# EAGLE board Trabalho_Layout_PCB_com_espaco_para_protoboard (EAGLE 9.7.0)
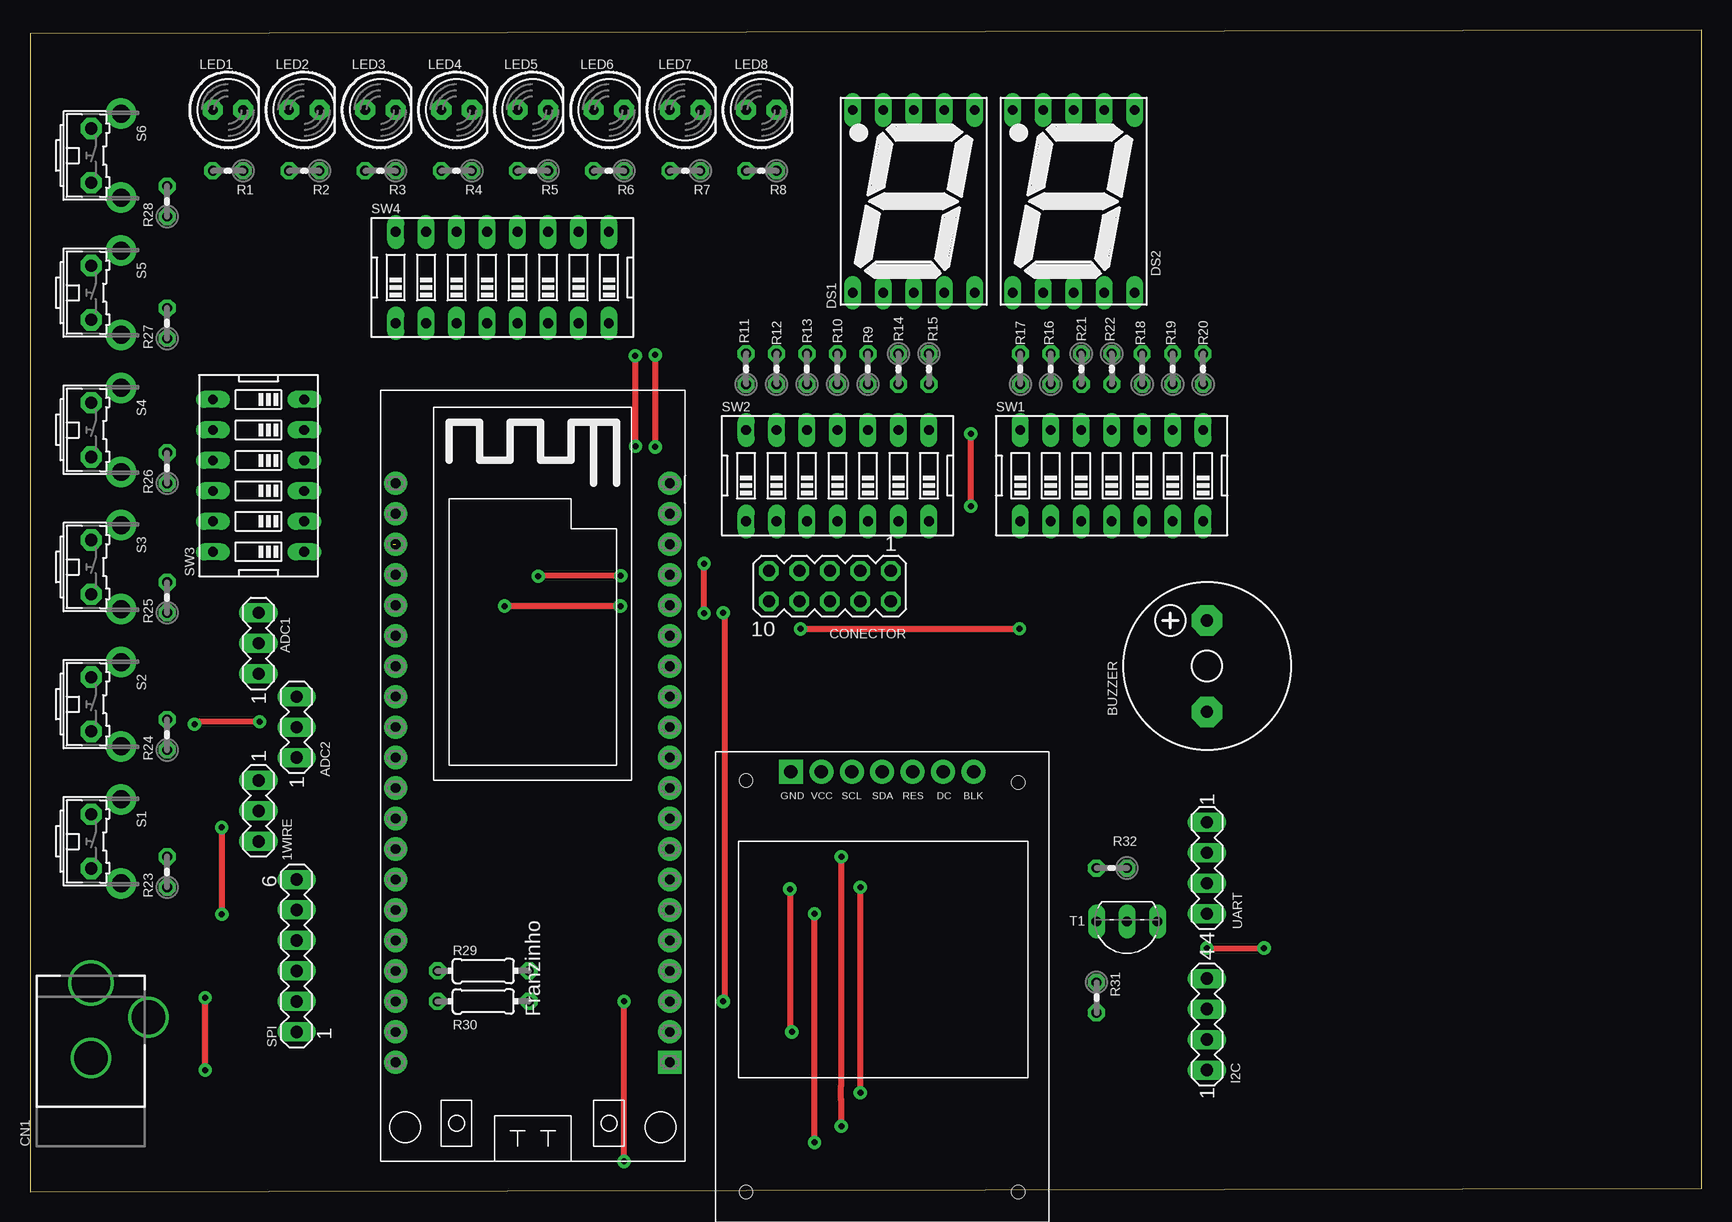
[diagram p0: board, top side]
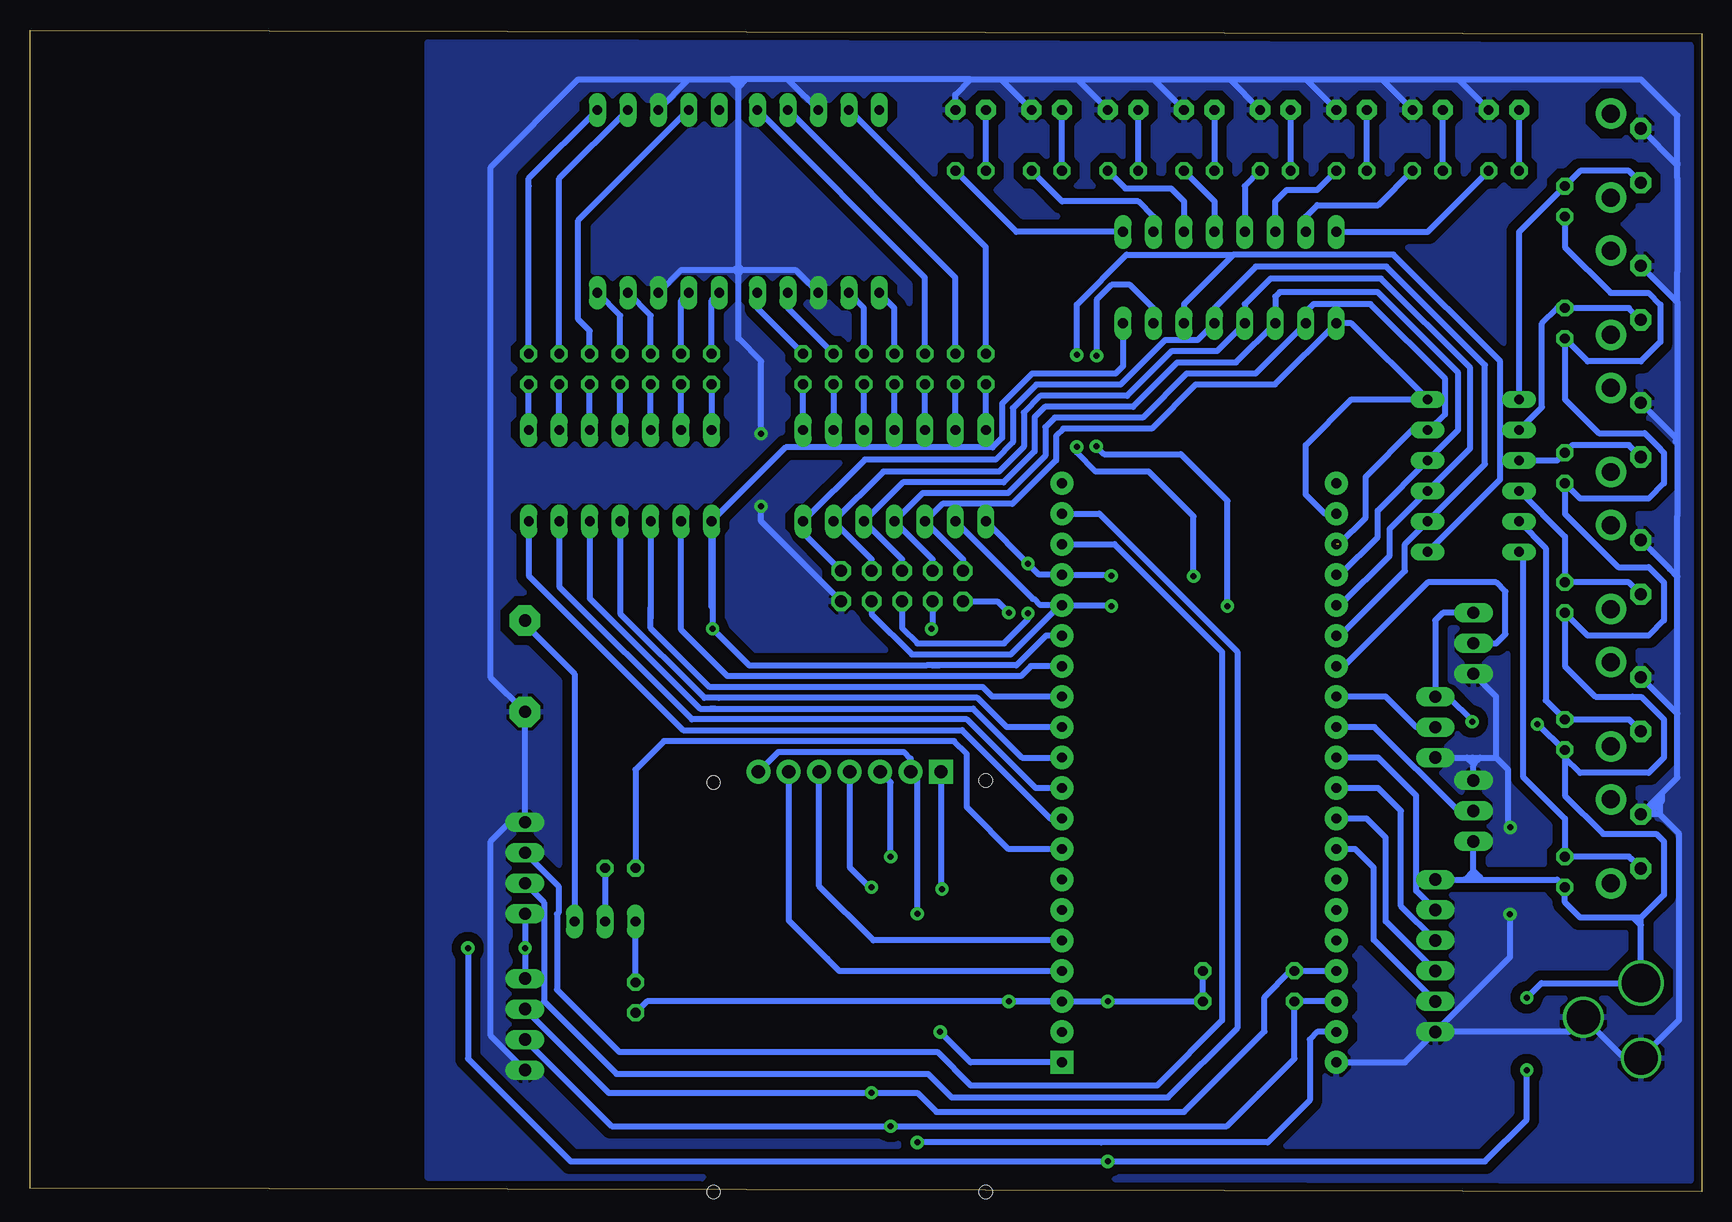
[diagram p1: board, bottom side, seen from below]

Size 139.37 x 96.83 mm. Coordinates in mm from the lower left corner, seen from the top.
Outline: 0,0 139.37,0.32 139.37,96.83 0,96.51 0,0
Copper layers (1*16): Top / Bottom
Stack-up Default Layer Stack: Top User Defined 0.035mm / Dielectric-1 User Defined 1.5mm / Bottom User Defined 0.035mm
Design rules "default *": minimum track width 0.5mm, minimum drill 0.5mm, track to track 0.8mm, track to pad 0.8mm, pad to pad 0.5mm, via to via 0.5mm, smd to smd 0.5mm, copper to edge 0.7mm, drill to drill 0.5mm, minimum pad ring 0.3mm, minimum via ring 0.3mm, stop-mask expansion 4mil, vias tented up to drill 0mil, thermal gap 10mil

## Footprints (pad centres in the part's own frame; a part is rotated, then mirrored left to right if it is on the bottom)
MA03-1 = drill 1.016 long: 1 -2.54,0; 2 0,0; 3 2.54,0
F/CM12P = drill 1.016 pad 2.54 octagon: + 3.81,0; - -3.81,0
DCJACK_2MM_PTH = drill 2.8: GND 0,7.35; GNDBREAK 4.8,10.75 | drill 3.2: PWR 0,13.6
MA05-2 = drill 1.016 octagon: 1 -5.08,-1.27; 2 -5.08,1.27; 3 -2.54,-1.27; 4 -2.54,1.27; 5 0,-1.27; 6 0,1.27; 7 2.54,-1.27; 8 2.54,1.27; 9 5.08,-1.27; 10 5.08,1.27
7SEG-13 = drill 0.813 long: 1 -5.08,-7.62; 2 -2.54,-7.62; 3 0,-7.62; 4 2.54,-7.62; 5 5.08,-7.62; 6 5.08,7.62; 7 2.54,7.62; 8 0,7.62; 9 -2.54,7.62; 10 -5.08,7.62
MA04-1 = drill 1.016 long: 1 -3.81,0; 2 -1.27,0; 3 1.27,0; 4 3.81,0
LED5MM = drill 0.813 pad 1.676 octagon: A -1.27,0; K 1.27,0
0204V = drill 0.813 octagon: 1 -1.27,0; 2 1.27,0
0204/7 = drill 0.813 octagon: 1 -3.81,0; 2 3.81,0
B3F-31XX = drill 1.016 pad 1.778 octagon: 1 -2.261,-1.245; 2 2.261,-1.245 | drill 1.499 pad 2.54: 3 -3.505,1.245; 4 3.505,1.245
MA06-1 = drill 1.016 long: 1 -6.35,0; 2 -3.81,0; 3 -1.27,0; 4 1.27,0; 5 3.81,0; 6 6.35,0
EDG-07 = drill 0.813 long: 1 -7.62,-3.81; 2 -5.08,-3.81; 3 -2.54,-3.81; 4 0,-3.81; 5 2.54,-3.81; 6 5.08,-3.81; 7 7.62,-3.81; 8 7.62,3.81; 9 5.08,3.81; 10 2.54,3.81; 11 0,3.81; 12 -2.54,3.81; 13 -5.08,3.81; 14 -7.62,3.81
EDG-06 = drill 0.813 long: 1 -6.35,-3.81; 2 -3.81,-3.81; 3 -1.27,-3.81; 4 1.27,-3.81; 5 3.81,-3.81; 6 6.35,-3.81; 7 6.35,3.81; 8 3.81,3.81; 9 1.27,3.81; 10 -1.27,3.81; 11 -3.81,3.81; 12 -6.35,3.81
EDG-08 = drill 0.813 long: 1 -8.89,-3.81; 2 -6.35,-3.81; 3 -3.81,-3.81; 4 -1.27,-3.81; 5 1.27,-3.81; 6 3.81,-3.81; 7 6.35,-3.81; 8 8.89,-3.81; 9 8.89,3.81; 10 6.35,3.81; 11 3.81,3.81; 12 1.27,3.81; 13 -1.27,3.81; 14 -3.81,3.81; 15 -6.35,3.81; 16 -8.89,3.81
TO92-EBC-OVAL = drill 0.813 long: B 0,-1.27; C 2.54,-1.27; E -2.54,-1.27
ESP32-FRANZINHO = drill 0.813 pad 1.93: 0 56.517,24.13; 1 53.977,24.13; 2 51.437,24.13; 3 48.897,24.13; 3V3 10.797,24.13; 4 46.357,24.13; 5 43.817,24.13; 5V 13.337,1.27; 6 41.277,24.13; 7 38.737,24.13; 8 15.877,24.13; 9 13.337,24.13; 10 36.197,24.13; 11 33.657,24.13; 12 31.117,24.13; 13 28.577,24.13; 14 26.037,24.13; 15 23.497,24.13; 16 20.957,24.13; 17 18.417,24.13; 18 15.877,1.27; 21 18.417,1.27; 26 20.957,1.27; 33 23.497,1.27; 34 26.037,1.27; 35 28.577,1.27; 36 31.117,1.27; 37 33.657,1.27; 38 36.197,1.27; 39 38.737,1.27; 40 41.277,1.27; 41 43.817,1.27; 42 46.357,1.27; 43 48.897,1.27; 44 51.437,1.27; 45 53.977,1.27; 46 56.517,1.27; GND 8.257,24.13; GND2 10.797,1.27 | drill 0.813 pad 1.93 square: GND1 8.257,1.27
DISPLAY = drill 1.1 pad 2: BLK 21.511,37.544; DC 18.971,37.544; RES 16.431,37.544; SCL 11.351,37.544; SDA 13.891,37.544; VCC 8.811,37.544 | drill 1.1 pad 2 square: GND 6.271,37.544 | hole 1.1: 25.241,36.671; 2.54,36.83; 2.54,2.54; 25.241,2.54

## Placement (x,y rotation side)
1WIRE  [MA03-1]  19.05,31.75 270 top
ADC1  [MA03-1]  19.05,45.72 90 top
ADC2  [MA03-1]  22.22,38.73 90 top
BUZZER  5V-12mm  [F/CM12P]  98.11,43.81 90 top
CN1  [DCJACK_2MM_PTH]  5.08,3.81 0 top
CONECTOR  [MA05-2]  66.67,50.48 180 top
DS1  7SEG-CK  [7SEG-13]  73.66,82.55 180 top
DS2  7SEG-CK  [7SEG-13]  87,82.55 180 top
I2C  [MA04-1]  98.11,13.97 90 top
LED1  [LED5MM]  16.51,90.17 0 top
LED2  [LED5MM]  22.86,90.17 0 top
LED3  [LED5MM]  29.21,90.17 0 top
LED4  [LED5MM]  35.56,90.17 0 top
LED5  [LED5MM]  41.91,90.17 0 top
LED6  [LED5MM]  48.26,90.17 0 top
LED7  [LED5MM]  54.61,90.17 0 top
LED8  [LED5MM]  60.96,90.17 0 top
R1  470  [0204V]  16.51,85.09 180 top
R2  470  [0204V]  22.86,85.09 180 top
R3  470  [0204V]  29.21,85.09 180 top
R4  470  [0204V]  35.56,85.09 180 top
R5  470  [0204V]  41.91,85.09 180 top
R6  470  [0204V]  48.26,85.09 180 top
R7  470  [0204V]  54.61,85.09 180 top
R8  470  [0204V]  60.96,85.09 180 top
R9  470  [0204V]  69.85,68.58 90 top
R10  470  [0204V]  67.31,68.58 90 top
R11  470  [0204V]  59.69,68.58 90 top
R12  470  [0204V]  62.23,68.58 90 top
R13  470  [0204V]  64.77,68.58 90 top
R14  470  [0204V]  72.39,68.58 270 top
R15  470  [0204V]  74.93,68.58 270 top
R16  470  [0204V]  85.09,68.58 90 top
R17  470  [0204V]  82.55,68.58 90 top
R18  470  [0204V]  92.71,68.58 90 top
R19  470  [0204V]  95.25,68.58 90 top
R20  470  [0204V]  97.79,68.58 90 top
R21  470  [0204V]  87.63,68.58 270 top
R22  470  [0204V]  90.17,68.58 270 top
R23  10k  [0204V]  11.43,26.67 90 top
R24  10k  [0204V]  11.43,38.1 90 top
R25  10k  [0204V]  11.43,49.53 90 top
R26  10k  [0204V]  11.43,60.33 90 top
R27  10k  [0204V]  11.43,72.39 90 top
R28  10k  [0204V]  11.43,82.55 90 top
R29  10k  [0204/7]  37.78,18.41 0 top
R30  10k  [0204/7]  37.78,15.88 0 top
R31  470  [0204V]  88.9,16.19 270 top
R32  470  [0204V]  90.17,26.99 180 top
S1  [B3F-31XX]  6.35,29.21 270 top
S2  [B3F-31XX]  6.35,40.64 270 top
S3  [B3F-31XX]  6.35,52.07 270 top
S4  [B3F-31XX]  6.35,63.5 270 top
S5  [B3F-31XX]  6.35,74.93 270 top
S6  [B3F-31XX]  6.35,86.36 270 top
SPI  [MA06-1]  22.22,19.69 90 top
SW1  [EDG-07]  90.17,59.69 0 top
SW2  [EDG-07]  67.31,59.69 0 top
SW3  [EDG-06]  19.05,59.69 90 top
SW4  [EDG-08]  39.37,76.2 0 top
T1  2N2222  [TO92-EBC-OVAL]  91.44,21.27 180 top
U$1  FRANZINHO  [ESP32-FRANZINHO]  54.61,2.54 90 top
U$2  IPS-LCD-1.3"  [DISPLAY]  57.15,-2.54 0 top
UART  [MA04-1]  98.11,26.99 270 top

## Library data of the parts
1WIRE ADC1 ADC2 CONECTOR I2C SPI UART = con-lstb; OC_FARNELL: unknown; OC_NEWARK: unknown
BUZZER = buzzer; OC_FARNELL: unknown; OC_NEWARK: unknown
CN1 LED1-LED8 S1-S6 T1 = adafruit
DS1 DS2 = Opto-Electronic; CATEGORY: Opto-Electronic; SUB-CATEGORY: Display; TYPE: 7-Segment
R1-R32 = rcl; SPICEPREFIX: R
SW1-SW4 = special
U$1 = Esp 32
U$2 = dISPLAY

## Nets
3V3: U$1.3V3 U$2.BLK U$2.VCC
+5V: 1WIRE.3 ADC1.3 ADC2.3 CN1.PWR CONECTOR.10 I2C.4 R23.1 R24.1 R25.1 R26.1 R27.1 R28.1 R29.2 R30.2 R31.2 SPI.6 U$1.5V UART.4
ADC1: ADC2.2 U$1.7
ADC2: ADC1.2 U$1.6
BUZZER: R32.2 U$1.34
CLK: SPI.2 U$1.14
CS: SPI.5 U$1.11
DC: U$1.18 U$2.DC
GND: 1WIRE.1 ADC1.1 ADC2.1 BUZZER.- CN1.GND CN1.GNDBREAK CONECTOR.2 DS1.3 DS1.8 DS2.3 DS2.8 I2C.1 LED1.K LED2.K LED3.K LED4.K LED5.K LED6.K LED7.K LED8.K S1.1 S2.1 S3.1 S4.1 S5.1 S6.1 SPI.1 U$1.GND UART.1
GND1: U$1.GND1 U$2.GND
GPIO1: CONECTOR.9 SW2.3 SW3.6 SW4.1 U$1.1
GPIO2: CONECTOR.7 SW2.4 SW3.5 SW4.2 U$1.2
GPIO3: CONECTOR.5 SW2.5 SW3.4 SW4.3 U$1.3
GPIO4: CONECTOR.3 SW2.6 SW3.3 SW4.4 U$1.4
GPIO5: CONECTOR.1 SW2.7 SW3.2 SW4.5 U$1.5
GPIO10: 1WIRE.2 U$1.10
GPIO34: SW1.7 U$1.35
GPIO35: SW1.6 U$1.36
GPIO36: SW1.5 U$1.37
GPIO37: SW1.4 U$1.38
GPIO38: SW1.3 U$1.39
GPIO39: SW1.2 U$1.40
GPIO40: CONECTOR.8 SW1.1 SW4.8 U$1.41
GPIO41: CONECTOR.4 SW2.2 SW4.7 U$1.42
GPIO42: CONECTOR.6 SW2.1 SW3.1 SW4.6 U$1.43
MISO: SPI.4 U$1.12
MOSI: SPI.3 U$1.13
N$1: BUZZER.+ T1.E
N$2: LED1.A R1.2
N$3: R31.1 T1.C
N$4: R32.1 T1.B
N$5: U$1.17
N$6: U$1.16
N$7: U$1.15
N$8: LED2.A R2.2
N$9: LED3.A R3.2
N$10: LED4.A R4.2
N$11: LED6.A R6.2
N$12: LED7.A R7.2
N$13: LED8.A R8.2
N$14: LED5.A R5.2
N$15: DS2.10 R22.1
N$16: DS2.9 R21.1
N$17: DS2.4 R18.2
N$18: DS2.2 R19.2
N$19: R13.1 SW2.12
N$20: U$1.0
N$22: U$1.GND2
N$23: R12.1 SW2.13
N$24: R11.1 SW2.14
N$25: R10.1 SW2.11
N$26: U$1.33
N$27: R9.1 SW2.10
N$28: R14.2 SW2.9
N$29: R15.2 SW2.8
N$30: R28.2 S6.2 SW3.7
N$31: R27.2 S5.2 SW3.8
N$32: R26.2 S4.2 SW3.9
N$33: R25.2 S3.2 SW3.10
N$34: R24.2 S2.2 SW3.11
N$35: R23.2 S1.2 SW3.12
N$36: R1.1 SW4.16
N$37: R8.1 SW4.9
N$38: R7.1 SW4.10
N$39: U$1.26
N$40: U$1.46
N$41: R2.1 SW4.15
N$42: R6.1 SW4.11
N$43: R3.1 SW4.14
N$44: R5.1 SW4.12
N$45: R4.1 SW4.13
N$46: DS2.1 R20.2
N$47: DS2.6 R17.2
N$48: DS2.7 R16.2
N$50: R19.1 SW1.9
N$51: R18.1 SW1.10
N$52: R17.1 SW1.14
N$53: R16.1 SW1.13
N$54: R21.2 SW1.12
N$55: R22.2 SW1.11
N$56: DS1.10 R15.1
N$57: DS1.9 R14.1
N$58: DS1.4 R11.2
N$59: DS1.2 R12.2
N$60: DS1.1 R13.2
N$61: DS1.6 R10.2
N$62: DS1.7 R9.2
N$63: R20.1 SW1.8
RES: U$1.21 U$2.RES
RX: U$1.45 UART.3
SCL: I2C.2 R30.1 U$1.9 U$2.SCL
SDA: I2C.3 R29.1 U$1.8 U$2.SDA
TX: U$1.44 UART.2

## Tracks (layer width: path | path; a pad name or v marks a point on that pad's centre or on a via)
3V3  (via drill 0.5)
  Top 0.5: v65.41,4.13 v65.41,23.18
  Bottom 0.5: U$1.3V3 32.07,13.34 32.7,12.7 32.7,7.62 36.2,4.13 50.1,4.13 v65.41,4.13 | v65.41,23.18 65.41,34.45 U$2.VCC 65.96,36.12 66.52,36.68 76.99,36.68 U$2.BLK
+5V  (via drill 0.5)
  Top 0.5: v98.11,20.32 v102.87,20.32 | v49.53,2.54 v49.53,15.88 | v14.61,10.16 v14.61,16.19 | v57.79,48.26 57.89,48.16 57.89,15.98 v57.79,15.88 | v19.15,39.19 13.93,39.19 v13.71,38.98
  Bottom 0.5: R29.2 R30.2 v49.53,15.88 U$1.5V | R28.1 11.43,78.74 7.62,74.93 4.45,74.93 3.47,73.95 3.47,70.83 5.08,69.22 9.53,69.22 R27.1 11.43,66.04 8.62,63.23 4.78,63.23 3.47,61.92 3.47,61.89 3.17,61.59 3.17,59.06 4.45,57.78 10.16,57.78 R26.1 11.43,56.52 6.98,52.07 4.45,52.07 3.17,50.8 3.17,47.62 4.45,46.36 9.53,46.36 R25.1 11.43,43.81 8.89,41.27 5.8,41.27 5.78,41.26 5.07,41.26 3.17,39.37 3.17,36.2 4.45,34.92 10.16,34.92 11.43,36.2 11.43,36.75 | 11.43,36.75 R24.1 11.43,36.75 | 11.43,36.75 11.43,33.02 8.24,29.83 4.43,29.83 4.41,29.84 3.81,29.84 3.17,29.21 3.17,24.77 5.08,22.86 | 5.08,22.86 5.71,22.86 | 5.71,22.86 10.16,22.86 11.43,24.13 R23.1 12.07,26.04 18.51,26.04 | 5.08,22.23 CN1.PWR 13.39,17.41 v14.61,16.19 | 5.08,22.23 5.08,22.86 | 5.08,22.23 5.71,22.86 | SPI.6 19.84,26.04 | 19.84,26.04 19.01,26.04 | ADC1.3 21.59,48.26 22.22,47.62 ADC2.3 21.16,41.27 19.12,39.23 | UART.4 v98.11,20.32 I2C.4 | R31.2 87.95,15.88 U$1.5V | v102.87,20.32 102.87,11.11 94.3,2.54 v49.53,2.54 18.1,2.54 14.61,6.03 v14.61,10.16 | CONECTOR.10 58.74,49.21 v57.79,48.26 | v57.79,15.88 v57.78,15.88 U$1.5V | 19.05,26.77 19.05,26.07 19.01,26.04 | 19.05,26.77 1WIRE.3 | 19.01,26.04 18.51,26.04 | 18.51,26.04 18.51,26.23 19.05,26.77 | 19.84,26.04 19.78,26.04 19.05,26.77 | 19.12,39.23 | 19.12,39.23 v19.15,39.19 | v13.71,38.98 13.66,38.98 11.43,36.75
ADC1
  Bottom 0.5: ADC2.2 23.81,38.73 26.35,41.28 U$1.7
ADC2
  Bottom 0.5: ADC1.2 17.14,45.72 16.38,46.49 16.38,50.03 17.14,50.8 22.86,50.8 29.84,43.82 U$1.6
BUZZER
  Bottom 0.5: R32.2 88.9,35.2 86.52,37.58 62.34,37.58 61.28,36.51 61.28,32.07 60.8,31.59 | U$1.34 57.79,28.58 60.8,31.59 | 60.8,31.59 60.96,31.75
CLK
  Bottom 0.5: SPI.2 27.35,21 27.35,27.04 28.89,28.58 U$1.14
CS
  Bottom 0.5: SPI.5 23.81,25.08 23.81,33.02 26.99,36.2 U$1.11
DC
  Bottom 0.5: U$2.DC 76.12,22.62 73.1,19.61 | 73.1,19.61 72.87,19.37 | 73.1,19.61 71.92,18.42 U$1.18
GND  (via drill 0.5)
  Top 0.5: v78.42,57.15 v78.42,63.18 | v15.98,30.38 15.98,23.15 v16,23.13
  Bottom 0.5: S2.1 2.69,40.49 2.06,39.85 | 2.06,51.28 2.06,56.36 2.06,62.55 | S3.1 2.69,51.92 2.06,51.28 | 2.06,62.86 2.06,62.71 | 2.06,62.71 2.06,62.55 | 2.06,62.71 S4.1 4.12,64.77 | 2.06,62.71 2.06,65.41 2.06,74.14 | 2.06,74.14 2.06,76.68 2.06,84.45 2.06,85.72 | S5.1 2.69,74.78 2.06,74.14 | 2.06,85.72 2.06,85.57 S6.1 | LED8.K 62.23,91.44 60.96,92.71 | 60.96,92.71 58.42,92.71 | 58.42,92.71 LED7.K | 58.42,92.71 52.07,92.71 | 52.07,92.71 LED6.K | 52.07,92.71 45.72,92.71 | 45.72,92.71 LED5.K | 45.72,92.71 39.37,92.71 | 39.37,92.71 LED4.K | 39.37,92.71 33.02,92.71 | 33.02,92.71 LED3.K | 33.02,92.71 26.67,92.71 | 26.67,92.71 LED2.K | 26.67,92.71 20.32,92.71 | 20.32,92.71 LED1.K | 20.32,92.71 5.08,92.71 2.06,89.69 2.06,85.72 | U$1.GND 24.76,10.8 SPI.1 | SPI.1 11.11,13.34 CN1.GNDBREAK 6.48,11.16 CN1.GND 1.91,14.34 1.91,29.84 3.49,31.43 | S1.1 3.37,33.21 | 3.37,33.21 2.06,34.52 2.06,39.85 | 2.06,39.85 2.06,51.28 | 4.45,31.47 3.53,31.47 3.49,31.43 | 4.45,31.47 S1.1 | 3.49,31.43 3.49,33.08 3.37,33.21 | 3.37,33.21 3.37,32.55 4.3,31.61 | 4.3,31.61 4.45,31.47 | S1.1 4.97,31.61 4.3,31.61 | v15.98,30.38 16.16,30.56 16.16,35.21 17.14,36.2 | ADC2.1 19.59,36.2 | 19.59,36.2 19.14,36.2 | 19.14,36.2 18.48,36.2 | 18.48,36.2 17.14,36.2 | 17.14,36.2 17.14,41.27 ADC1.1 | DS2.8 85.09,76.83 80.64,76.83 | DS1.8 75.56,76.83 80.01,76.83 | 80.64,76.83 80.33,76.83 | 80.33,76.83 80.01,76.83 | DS1.3 75.88,92.39 76.04,92.55 76.2,92.71 | DS2.3 84.45,92.71 | 76.2,92.71 79.69,92.71 | 79.69,92.71 80.33,92.71 | 80.33,92.71 80.96,92.71 | 80.33,76.83 80.33,77.15 | 80.33,77.15 80.33,88.9 | 80.33,88.9 80.33,89.38 | 80.33,88.9 80.33,91.76 80.33,92.08 | 80.33,92.08 80.33,92.71 | 60.96,92.71 76.2,92.71 | 80.33,92.08 80.96,92.71
  Bottom 0.5: 80.33,92.08 79.69,92.71 | 84.45,92.71 93.66,92.71 100.97,85.41 100.97,42.86 BUZZER.- UART.1 99.38,30.8 100.97,29.21 100.97,13.02 I2C.1 | 84.45,92.71 80.96,92.71 | 2.06,62.55 2.22,62.55 2.06,62.71 | CONECTOR.2 78.42,55.88 v78.42,57.15 | v78.42,63.18 78.42,69.22 80.33,71.12 80.33,76.2 | 80.33,76.2 80.33,76.52 | 80.33,76.52 80.33,76.83 | 80.33,76.2 80.33,76.52 | 80.33,76.52 80.01,76.83 | 80.01,76.83 80.33,77.15 | 80.64,76.83 80.33,77.15 | 80.64,76.83 80.33,76.52 | v16,23.13 16,19.56 SPI.1 | 1WIRE.1 19.05,35.72 | 19.05,35.72 19.05,36.1 19.14,36.2 | 19.05,35.72 18.96,35.72 18.48,36.2 | 19.05,35.72 19.11,35.72 19.59,36.2
  pour Bottom: 106.45,96.77 -0.25,96.77 -0.25,-0.25 106.45,-0.25
GND1  (via drill 0.5)
  Top 0.5: v63.34,25.24 63.34,13.49 v63.5,13.34
  Bottom 0.5: U$2.GND 63.42,25.48 63.5,25.4 v63.34,25.24 | v63.5,13.34 60.96,10.8 U$1.GND1
GPIO1
  Bottom 0.5: U$1.1 31.43,56.52 33.02,58.1 33.02,62.23 29.21,66.04 SW3.6 29.21,72.39 SW4.1 35.58,67.29 40.84,67.29 42.19,67.29 45.87,63.61 53.24,63.61 53.83,63.01 53.83,60.97 57.48,57.33 63.32,57.33 SW2.3 61.59,52.7 CONECTOR.9
GPIO2  (1 unrouted)
  Bottom 0.5: 30.25,53.98 28.04,56.2 28.04,59.59 24.13,63.5 SW3.5 22.7,63.5 21.4,64.8 21.4,67.76 27.62,73.98 32.38,73.98 33.02,73.34 SW4.2 37.2,68.2 42.94,68.2 46.62,64.53 53.94,64.53 54.73,63.73 54.73,61.34 57.85,58.23 64.96,58.23 SW2.4 64.14,52.7 CONECTOR.7
GPIO3
  Bottom 0.5: U$1.3 30.16,51.44 27.04,54.56 27.04,56.78 SW3.4 20.32,63.5 20.32,68.26 27.04,74.98 35.2,74.98 35.56,74.61 SW4.3 38.83,69.12 43.74,69.12 47.43,65.43 54.78,65.43 55.63,64.57 55.63,61.72 58.22,59.13 66.6,59.13 SW2.5 66.67,52.7 CONECTOR.5
GPIO4
  Bottom 0.5: U$1.4 30.16,48.9 26.04,53.02 26.04,55.25 SW3.3 19.32,61.96 19.32,68.68 26.75,76.1 35.97,76.1 38.1,73.98 SW4.4 40.4,70.09 44.17,70.09 47.93,66.33 55.15,66.33 56.53,64.95 56.53,62.09 58.59,60.03 68.24,60.03 SW2.6 69.22,52.7 CONECTOR.3
GPIO5
  Bottom 0.5: U$1.5 30.16,46.36 24.76,51.75 24.76,53.97 SW3.2 18.1,60.64 18.1,68.9 26.3,77.1 37.2,77.1 40.64,73.66 SW4.5 42.03,71 44.74,71 48.47,67.27 55.49,67.27 57.43,65.32 57.43,62.46 58.86,61.03 69.78,61.03 SW2.7 | SW2.7 74.93,55.25 | CONECTOR.1 74.93,54.93 SW2.7
GPIO10
  Bottom 0.5: 1WIRE.2 20.32,31.75 27.31,38.74 U$1.10
GPIO34
  Bottom 0.5: U$1.35 54.32,31.12 61.68,38.48 84.91,38.48 97.79,51.36 SW1.7
GPIO35
  Bottom 0.5: U$1.36 55.53,33.66 61.25,39.38 84.19,39.38 95.25,50.43 SW1.6
GPIO36
  Bottom 0.5: U$1.37 56.67,36.2 60.75,40.28 82.28,40.28 | 82.28,40.28 82.62,40.28 | 82.28,40.28 83.52,40.28 92.71,49.47 SW1.5
GPIO37
  Bottom 0.5: U$1.38 57.94,38.74 60.38,41.18 81.96,41.18 83.15,41.18 90.17,48.2 SW1.4
GPIO38
  Bottom 0.5: U$1.39 59.15,41.28 59.95,42.08 81.88,42.08 82.72,42.08 87.63,46.99 87.63,48.74 | SW1.3 87.63,48.74 | 87.63,48.74 87.63,47.83
GPIO39
  Bottom 0.5: SW1.2 85.09,46.83 81.24,42.98 56.78,42.98 55.94,43.82 U$1.40
GPIO40  (via drill 0.5)
  Top 0.5: v64.23,46.92 82.45,46.92 v82.48,46.94
  Bottom 0.5: 82.55,48.72 SW1.1 | 64.14,48.62 CONECTOR.8 64.14,46.84 64.14,46.83 v64.23,46.92 | SW1.1 76.39,62.04 59.12,62.04 58.33,62.83 58.33,65.69 55.84,68.19 48.88,68.19 48.26,68.81 SW4.8 | SW1.1 82.48,55.81 v82.48,46.94 79.42,43.88 64.66,43.88 | U$1.41 54.68,46.36 57.16,43.88 63.59,43.88 | 64.66,43.88 64.16,43.88 63.59,43.88 | 63.8,43.88 63.59,43.88 | 63.59,43.88 64.66,43.88
GPIO41  (via drill 0.5)
  Top 0.5: v50.46,69.69 50.46,62.19 50.45,62.18 v50.49,62.14 | v49.22,48.82 v39.55,48.82
  Bottom 0.5: 53.51,48.9 U$1.42 49.29,48.9 v49.22,48.82 | CONECTOR.4 69.22,48.15 65.86,44.8 57.61,44.8 | 57.61,44.8 53.51,48.9 | 57.61,44.8 56.44,45.97 | 53.51,48.9 55.17,48.9 55.69,49.42 55.77,49.42 SW2.2 | SW4.7 45.72,73.64 47.67,75.59 49.21,75.59 50.46,74.33 v50.46,69.69 | v50.49,62.14 49.85,61.49 43.45,61.49 39.55,57.59 v39.55,48.82
GPIO42  (via drill 0.5)
  Top 0.5: v56.19,48.22 56.19,52.36 v56.18,52.37 | v52.12,69.75 v52.12,62.09 | v49.25,51.34 42.4,51.34 v42.37,51.31
  Bottom 0.5: SW3.1 16.83,59.37 16.83,69.22 25.72,78.1 39.05,78.1 | 39.05,78.1 43.18,73.98 SW4.6 | SW2.1 v56.18,52.37 55.25,51.44 U$1.43 49.34,51.44 v49.25,51.34 | CONECTOR.6 66.67,46.98 65.41,45.72 63.73,45.72 58.17,45.72 56.19,47.7 v56.19,48.22 | v52.12,69.75 52.12,73.95 47.96,78.1 39.05,78.1 | v52.12,62.09 52.12,61.62 50.54,60.05 46.12,60.05 42.37,56.3 v42.37,51.31
MISO
  Bottom 0.5: SPI.4 25.08,23.81 25.08,31.75 26.99,33.66 U$1.12
MOSI
  Bottom 0.5: SPI.3 26.35,22.54 26.35,29.53 27.94,31.12 U$1.13
N$1
  Bottom 0.5: T1.E 93.98,43.18 98.11,47.31 BUZZER.+
N$2
  Bottom 0.5: R1.2 LED1.A
N$3
  Bottom 0.5: R31.1 T1.C
N$4
  Bottom 0.5: R32.1 T1.B
N$8
  Bottom 0.5: R2.2 LED2.A
N$9
  Bottom 0.5: R3.2 LED3.A
N$10
  Bottom 0.5: LED4.A R4.2
N$11
  Bottom 0.5: R6.2 LED6.A
N$12
  Bottom 0.5: R7.2 LED7.A
N$13
  Bottom 0.5: R8.2 LED8.A
N$14
  Bottom 0.5: LED5.A R5.2
N$15
  Bottom 0.5: R22.1 90.17,73.03 DS2.10
N$16
  Bottom 0.5: R21.1 87.63,73.03 DS2.9
N$17
  Bottom 0.5: R18.2 92.71,71.75 93.66,72.71 93.66,80.96 DS2.4
N$18
  Bottom 0.5: R19.2 95.25,84.45 DS2.2
N$19
  Bottom 0.5: SW2.12 R13.1
N$23
  Bottom 0.5: SW2.13 R12.1
N$24
  Bottom 0.5: SW2.14 R11.1
N$25
  Bottom 0.5: SW2.11 R10.1
N$27
  Bottom 0.5: SW2.10 R9.1
N$28
  Bottom 0.5: R14.2 SW2.9
N$29
  Bottom 0.5: SW2.8 R15.2
N$30
  Bottom 0.5: S6.2 6.1,85.09 10.16,85.09 R28.2 15.24,80.01 SW3.7
N$31
  Bottom 0.5: SW3.8 13.34,65.41 13.34,72.39 12.07,73.66 R27.2 6.1,73.66 S5.2
N$32
  Bottom 0.5: SW3.9 12.07,60.96 R26.2 10.79,62.23 6.1,62.23 S4.2
N$33
  Bottom 0.5: S3.2 6.1,50.8 R25.2 11.43,54.61 SW3.10
N$34
  Bottom 0.5: SW3.11 13.02,53.66 13.02,40.96 R24.2 6.1,39.37 S2.2
N$35
  Bottom 0.5: S1.2 5.91,27.75 6.1,27.94 R23.2 11.43,31.11 14.92,34.6 14.92,53.02 SW3.12
N$36
  Bottom 0.5: SW4.16 22.86,80.01 R1.1
N$37
  Bottom 0.5: SW4.9 57.15,80.01 R8.1
N$38
  Bottom 0.5: SW4.10 45.72,81.28 46.99,82.55 53.34,82.55 R7.1
N$41
  Bottom 0.5: SW4.15 33.02,81.28 32.07,82.23 26.99,82.23 R2.1
N$42
  Bottom 0.5: SW4.11 43.18,82.55 44.26,83.63 48.07,83.63 R6.1
N$43
  Bottom 0.5: SW4.14 35.56,82.55 34.61,83.5 32.07,83.5 R3.1
N$44
  Bottom 0.5: SW4.12 40.64,82.55 R5.1
N$45
  Bottom 0.5: R4.1 38.1,83.82 SW4.13
N$46
  Bottom 0.5: DS2.1 97.79,84.45 97.79,83.82 R20.2
N$47
  Bottom 0.5: R17.2 82.55,74.3 DS2.6
N$48
  Bottom 0.5: R16.2 85.09,74.3 DS2.7
N$50
  Bottom 0.5: SW1.9 R19.1
N$51
  Bottom 0.5: SW1.10 R18.1
N$52
  Bottom 0.5: R17.1 SW1.14
N$53
  Bottom 0.5: SW1.13 R16.1
N$54
  Bottom 0.5: SW1.12 R21.2
N$55
  Bottom 0.5: SW1.11 R22.2
N$56
  Bottom 0.5: R15.1 78.74,73.66 DS1.10
N$57
  Bottom 0.5: R14.1 76.2,73.66 DS1.9
N$58
  Bottom 0.5: R11.2 59.69,78.74 DS1.4
N$59
  Bottom 0.5: R12.2 62.23,76.2 DS1.2
N$60
  Bottom 0.5: R13.2 64.77,76.2 DS1.1
N$61
  Bottom 0.5: R10.2 67.31,73.66 DS1.6
N$62
  Bottom 0.5: R9.2 69.85,73.66 DS1.7
N$63
  Bottom 0.5: SW1.8 R20.1
RES
  Bottom 0.5: U$1.21 69.06,20.96 73.58,25.48 U$2.RES
RX
  Bottom 0.5: UART.3 96.52,24.13 96.52,15.88 90.49,9.84 64.5,9.84 62.55,7.89 44.5,7.89 38.73,13.65 38.73,45.02 50.23,56.52 U$1.45
SCL  (via drill 0.5)
  Top 0.5: v67.63,5.48 67.63,7.69 67.6,7.72 67.6,8.79 67.63,8.82 v67.63,27.94
  Bottom 0.5: U$1.9 R30.1 33.97,11.11 36.99,8.1 | 36.99,8.1 36.83,8.26 | I2C.2 90.88,5.48 v67.63,5.48 39.61,5.48 36.99,8.1 | v67.63,27.94 67.63,34.13 U$2.SCL
SDA  (via drill 0.5)
  Top 0.5: v69.22,8.26 v69.22,25.4
  Bottom 0.5: U$1.8 R29.1 34.29,18.41 36.47,16.24 36.47,13.38 43.18,6.67 63.82,6.67 65.41,8.26 v69.22,8.26 91.12,8.26 I2C.3 | U$2.SDA 71.04,27.07 69.37,25.4 v69.22,25.4
TX
  Bottom 0.5: UART.2 95.33,25.48 95.33,23.26 95.44,23.15 95.44,16.86 90.25,11.67 63.74,11.67 60.96,8.89 45.4,8.89 40.01,14.29 40.01,45.01 48.97,53.98 U$1.44